# EAGLE board SSB Transceiver_SA612 Mixer (EAGLE 9.4.2)
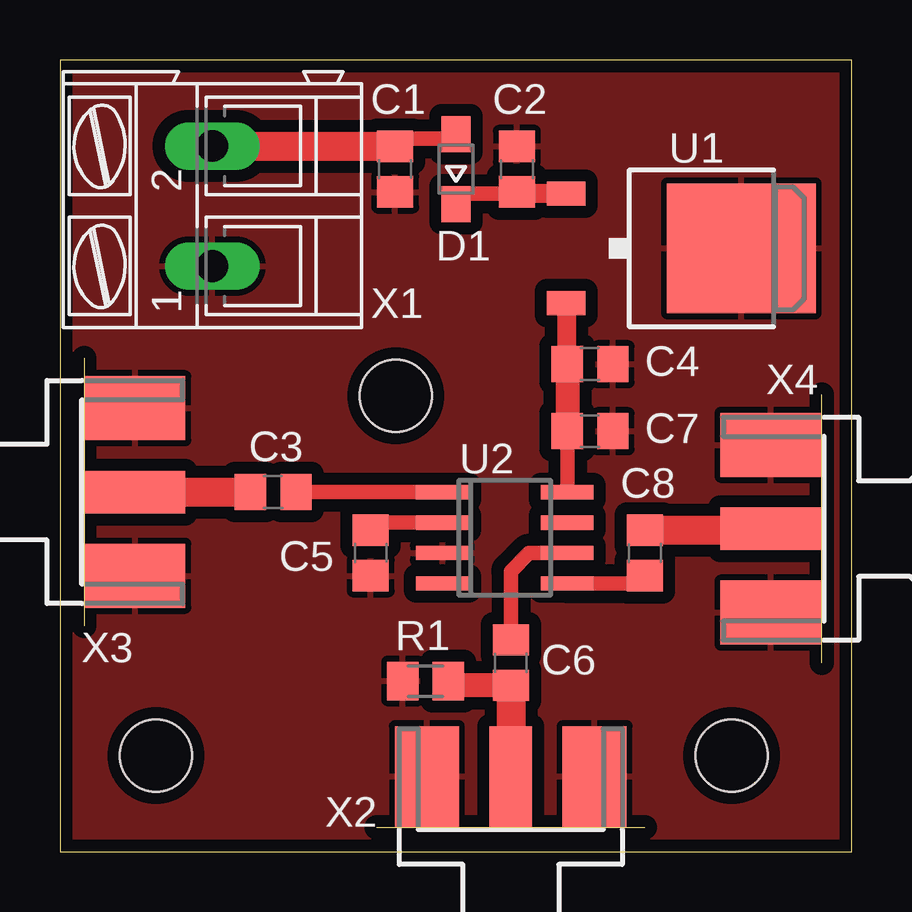
[diagram p0: board, top side]
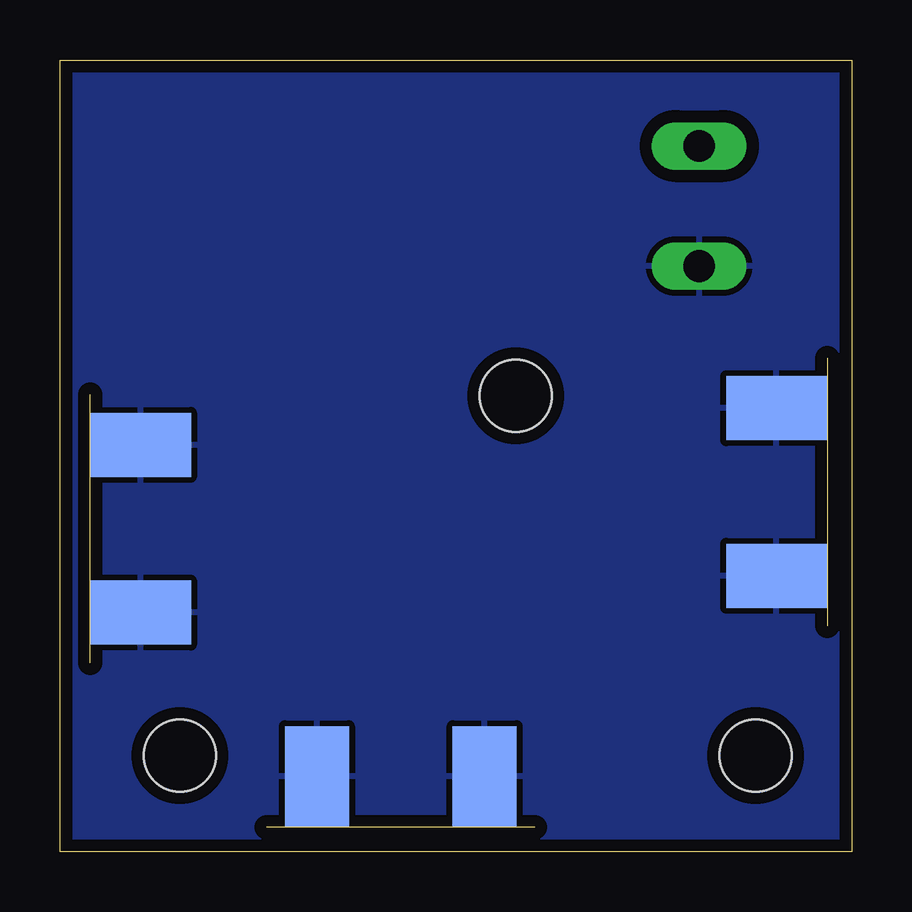
[diagram p1: board, bottom side, seen from below]

Size 33 x 33 mm. Coordinates in mm from the lower left corner, seen from the top.
Outline: 0,0 33,0 33,33 0,33 0,0
Copper layers (1*16): Top 0.035mm / dielectric 1.5mm / Bottom 0.035mm
Design rules "default *": minimum track width 6mil, minimum drill 0.35mm, track to track 20mil, track to pad 20mil, pad to pad 20mil, via to via 20mil, smd to smd 6mil, copper to edge 20mil, drill to drill 6mil, minimum pad ring 10mil, minimum via ring 8mil, stop-mask expansion 4mil, vias tented up to drill 0mil, thermal gap 10mil
Holes 3 mm at 4,4 28,4 14,19

## Footprints (pad centres in the part's own frame; a part is rotated, then mirrored left to right if it is on the bottom)
C0805 = smd 1.3 x 1.5: 1 -0.95,0; 2 0.95,0
SOD323-W = smd 1.5 x 1.2: A 1.45,0; C -1.45,0
M0805 = smd 1.3 x 1.6: 1 -0.95,0; 2 0.95,0
TO252 = smd 1 x 1.6: 1 -2.28,-4.8; 2 2.28,-4.8 | smd 5.4 x 6.2: 3 0,2.5
SO08 = smd 0.6 x 2.2: 1 -1.905,-2.6; 2 -0.635,-2.6; 3 0.635,-2.6; 4 1.905,-2.6; 5 1.905,2.6; 6 0.635,2.6; 7 -0.635,2.6; 8 -1.905,2.6
AK300/2 = drill 1.321 long: 1 -2.515,0; 2 2.489,0
J502-ND-142-0711-821/826 = smd 4.191 x 1.778: 1 2.115,0 | smd 4.191 x 2.667: G@1 2.115,3.495; G@2 2.115,-3.495 | smd 4.191 x 2.667 bottom: G@3 2.115,3.495; G@4 2.115,-3.495

## Placement (x,y rotation side)
C1  100nF  [C0805]  13.97,28.45 90 top
C2  330nF  [C0805]  19.05,28.45 270 top
C3  1nF  [C0805]  8.89,14.99 180 top
C4  100nF  [C0805]  22.1,20.32 180 top
C5  100nF  [C0805]  12.95,12.45 90 top
C6  10nF  [C0805]  18.8,7.87 270 top
C7  100nF  [C0805]  22.1,17.53 180 top
C8  100nF  [C0805]  24.38,12.45 270 top
D1  1N4148  [SOD323-W]  16.51,28.45 90 top
R1  51R  [M0805]  15.24,7.11 0 top
U1  7805DT  [TO252]  25.91,25.15 270 top
U2  SA612AD  [SO08]  18.54,13.08 270 top
X1  12V  [AK300/2]  6.35,26.92 90 top
X2  OSC. IN/OUT  [J502-ND-142-0711-821/826]  18.8,1.02 90 top
X3  IF IN/OUT  [J502-ND-142-0711-821/826]  1.02,14.99 0 top
X4  RF IN/OUT  [J502-ND-142-0711-821/826]  31.75,13.46 180 top

## Library data of the parts
C1-C8 = rcl; SPICEPREFIX: C
D1 = diode
R1 = rcl; SPICEPREFIX: R
U1 = linear
U2 = Ham Radio
X1 = con-ptr500; OC_FARNELL: unknown; OC_NEWARK: unknown
X2-X4 = con-coax; MF: JOHNSON COMPONENTS; MPN: 142-0711-821; OC_FARNELL: 1019328; OC_NEWARK: 16F3627

## Nets
+5V: C4.2 C7.2 U1.2 U2.8
+24V: C1.2 D1.A X1.2
GND: C1.1 C2.1 C4.1 C5.1 C7.1 R1.1 U1.3 U2.3 X1.1 X2.G@1 X2.G@2 X2.G@3 X2.G@4 X3.G@1 X3.G@2 X3.G@3 X3.G@4 X4.G@1 X4.G@2 X4.G@3 X4.G@4
N$1: C6.2 R1.2 X2.1
N$2: C8.1 X4.1
N$3: C5.2 U2.2
N$4: C3.2 X3.1
N$5: C3.1 U2.1
N$6: C6.1 U2.6
N$7: C8.2 U2.5
N$8: C2.2 D1.C U1.1

## Tracks (layer width: path | path; a pad name or v marks a point on that pad's centre or on a via)
+5V
  Top 0.6: C7.2 U2.8
  Top 0.8: U1.2 21.11,20.36 C4.2
  Top 1: C4.2 C7.2
+24V
  Top 0.6: C1.2 14.29,29.72 16.33,29.72 D1.A
  Top 1.2: X1.2 13.96,29.41 C1.2
GND
  pour Top (isolate 0.5): 0,0 0,33 33,33 33,0
  pour Bottom (isolate 0.5): 0,0 0,33 33,33 33,0
N$1
  Top 1: C6.2 16.38,6.92 R1.2
  Top 1.2: C6.2 X2.1
N$2
  Top 1.2: C8.1 29.57,13.4 X4.1
N$3
  Top 0.6: C5.2 13.27,13.72 U2.2
N$4
  Top 1.2: X3.1 C3.2
N$5
  Top 0.6: C3.1 U2.1
N$6
  Top 0.6: U2.6 19.56,12.45 18.8,11.68 C6.1
N$7
  Top 0.6: C8.2 24.06,11.18 U2.5
N$8
  Top 0.6: D1.C 16.94,27.43 19.12,27.43
  Top 0.8: U1.1 19.12,27.43 C2.2